# Altium PCB main.PcbDoc
Units mil, origin at the board's own origin, x right, y up, seen from the top; angles counter-clockwise.
Board outline 2610.56 x 2583.38 mil, 2 copper layers (Top Layer, Bottom Layer); 71 components, 38 nets, 228 pads, 56 vias.
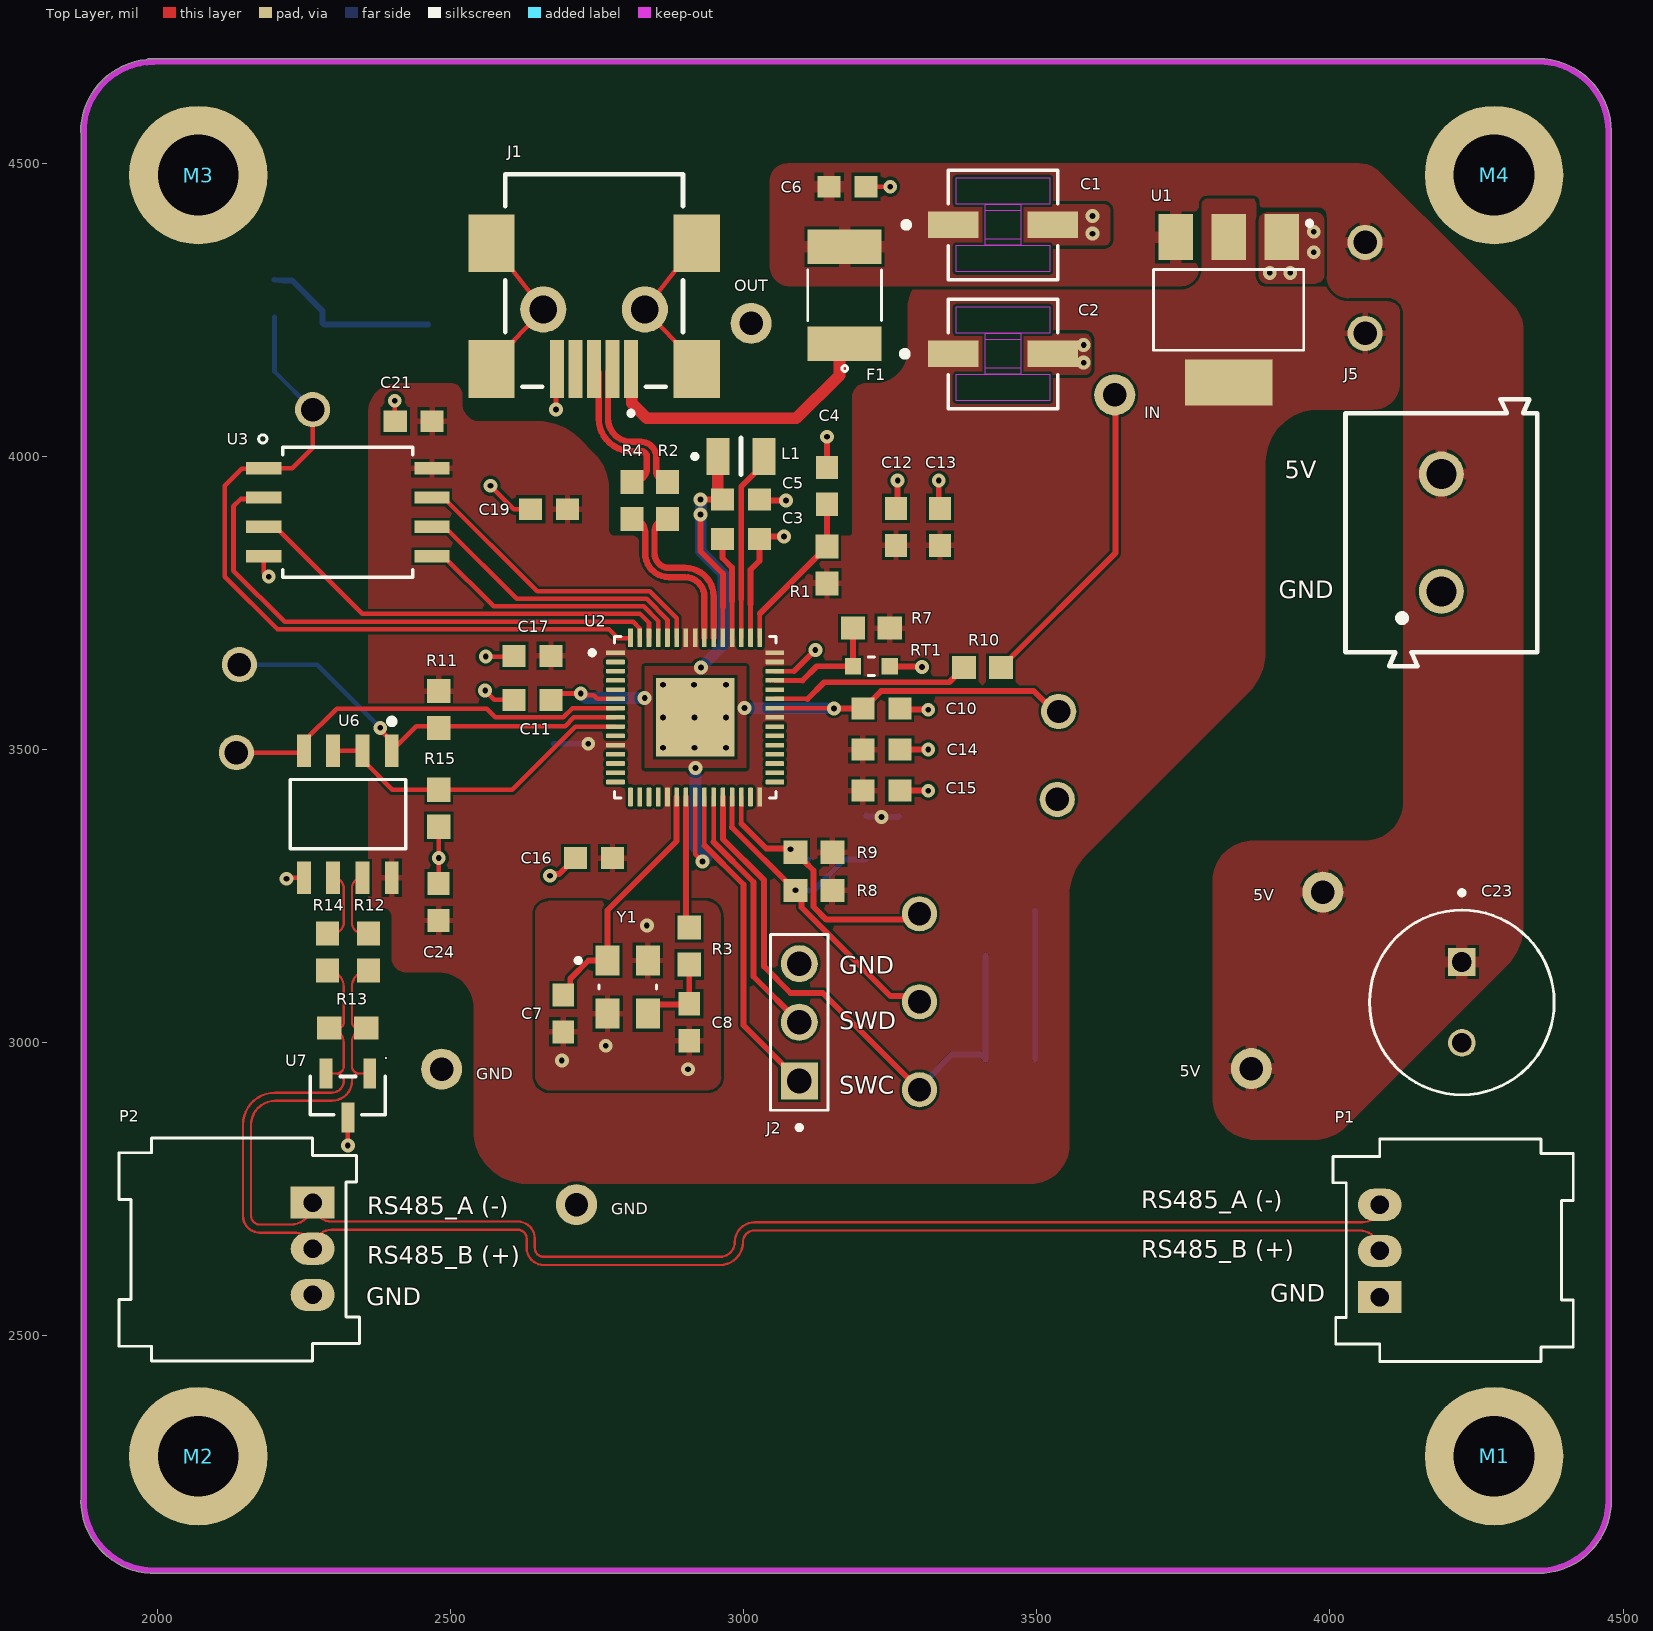
[diagram p0: Top Layer view]
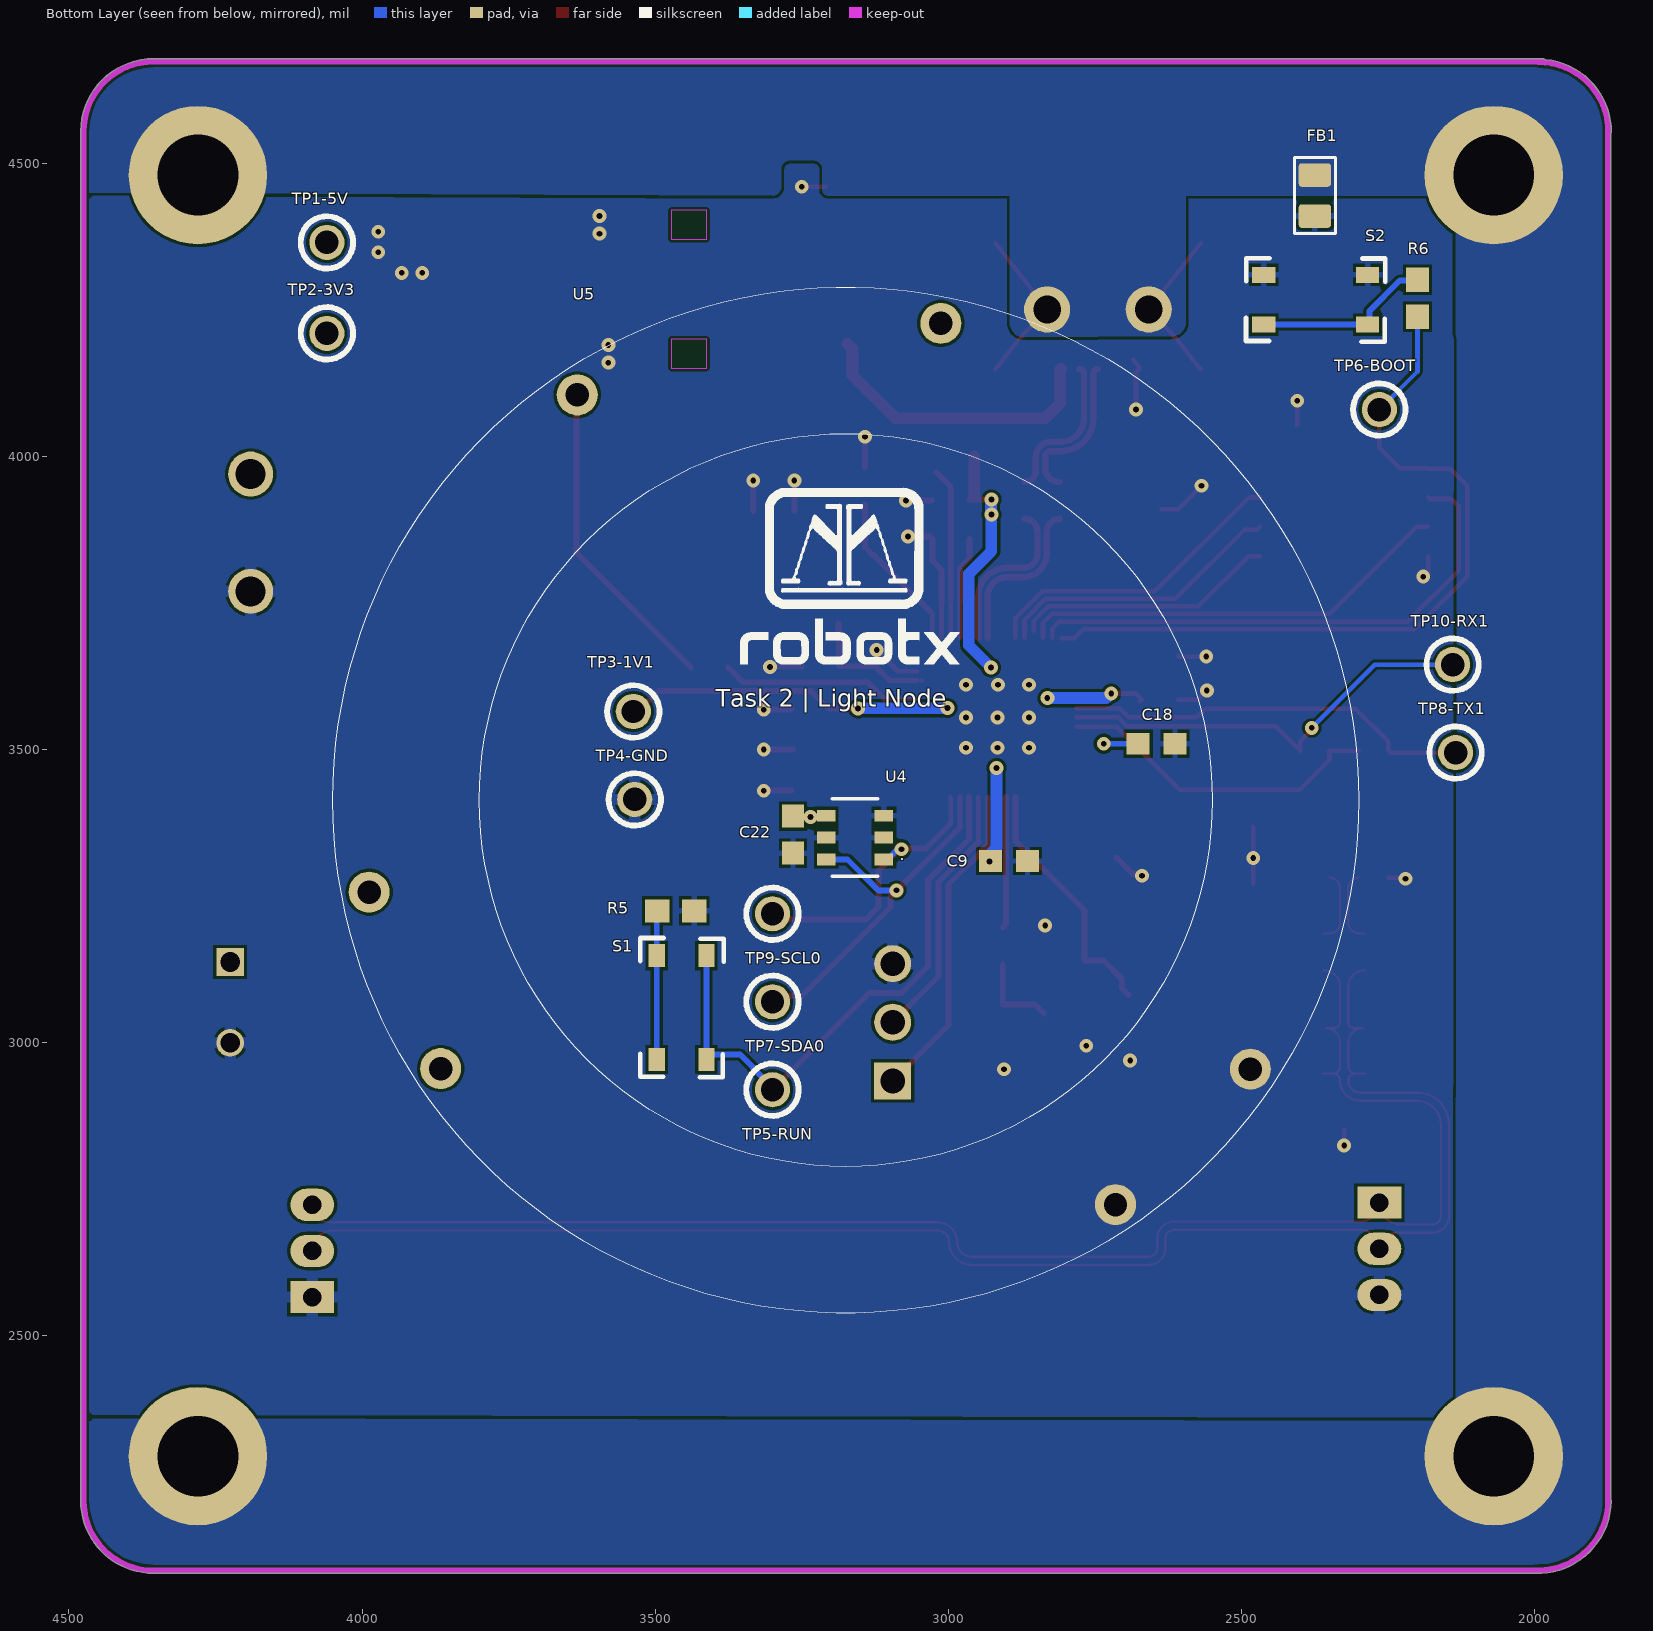
[diagram p1: Bottom Layer view, seen from below]
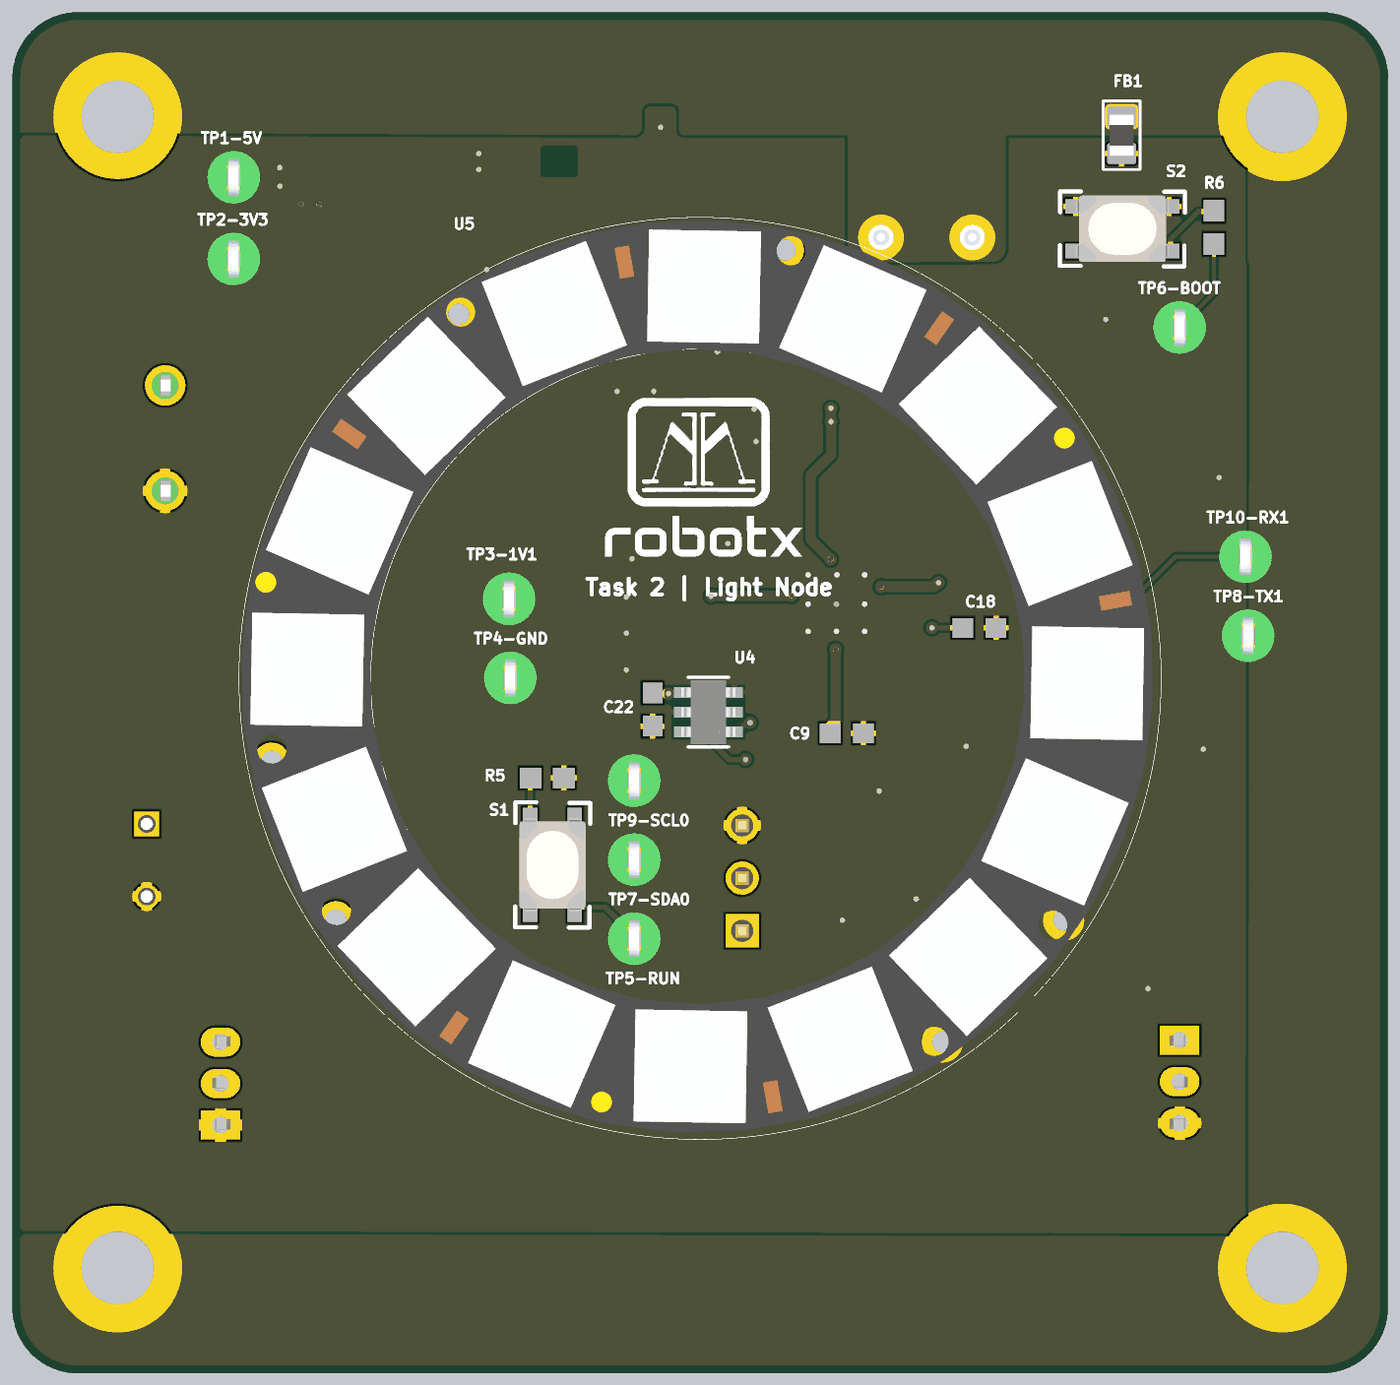
[diagram p2: 3D render of the assembled board from below, using the file's embedded part models]

## Layer stack, top to bottom
Top Solder: solder mask 0.4, Solder Resist, Dk 3.5
Top Layer: signal copper 1.4
Dielectric 1: dielectric 12.6, FR-4, Dk 4.8
Bottom Layer: signal copper 1.4
Bottom Solder: solder mask 0.4, Solder Resist, Dk 3.5

## Board outline
1870.06,2211.15 cw(c1994.2,2219.79) 1869.76,2219.79 1870.06,2221.49 1870.06,4550.7 1869.37,4553.22 cw(c1993.81,4553.22) 1905.82,4641.21 cw(c1993.81,4553.22) 1981.56,4677.05 1985,4678.45 4355.44,4678.45 cw(c4355.44,4554.01) 4443.43,4642 cw(c4355.44,4554.01) 4479.87,4554.82 4479.94,4554.01 4479.94,2219.5 cw(c4355.5,2219.5) 4443.49,2131.51 cw(c4355.5,2219.5) 4355.5,2095.06 1990,2095.06 1987.93,2095.52 cw(c1994.2,2219.79) 1906.21,2131.81 cw(c1994.2,2219.79)

## Design rules (kind name [scope] priority, off if disabled: settings)
Clearance [All] p1: gap=4.92 ignorepadtopadclearanceinfootprint=FALSE
DiffPairsRouting DiffPairsRouting_USB [InDifferentialPair('D')] p1: maxlimit=5 minlimit=5 mostfreqgap=5 toplayer_minwidth=10.91 toplayer_maxwidth=10.91 toplayer_prefwidth=10.91 bottomlayer_minwidth=10.91 bottomlayer_maxwidth=10.91 bottomlayer_prefwidth=10.91 impedanceprofiledriven=TRUE impedanceprofileid={66F68FF6-8895-42C2-95C7-FE0248E13F74} impedanceprofilevalue=90.000000 maxuncoupledlength=500
DiffPairsRouting DiffPairsRouting_USB_X [InDifferentialPair('DX')] p2: maxlimit=5 minlimit=5 mostfreqgap=5 toplayer_minwidth=10.91 toplayer_maxwidth=10.91 toplayer_prefwidth=10.91 bottomlayer_minwidth=10.91 bottomlayer_maxwidth=10.91 bottomlayer_prefwidth=10.91 impedanceprofiledriven=TRUE impedanceprofileid={66F68FF6-8895-42C2-95C7-FE0248E13F74} impedanceprofilevalue=90.000000 maxuncoupledlength=500
DiffPairsRouting DiffPairsRouting_RS485 [InDifferentialPair('RS485')] p3: maxlimit=12 minlimit=5 mostfreqgap=10 toplayer_minwidth=3.89 toplayer_maxwidth=8.08 toplayer_prefwidth=8.08 bottomlayer_minwidth=3.89 bottomlayer_maxwidth=8.08 bottomlayer_prefwidth=8.08 impedanceprofiledriven=TRUE impedanceprofileid={997596E2-6188-4B3D-A6B8-5A7A4A391E00} impedanceprofilevalue=120.000000 maxuncoupledlength=500
DiffPairsRouting DiffPairsRouting_RS485_X [InDifferentialPair('RS485X')] p4: maxlimit=12 minlimit=5 mostfreqgap=10 toplayer_minwidth=3.89 toplayer_maxwidth=8.08 toplayer_prefwidth=8.08 bottomlayer_minwidth=3.89 bottomlayer_maxwidth=8.08 bottomlayer_prefwidth=8.08 impedanceprofiledriven=TRUE impedanceprofileid={997596E2-6188-4B3D-A6B8-5A7A4A391E00} impedanceprofilevalue=120.000000 maxuncoupledlength=500
HoleSize [All] p1: absolutevalues=TRUE maxlimit=200 minlimit=1 maxpercent=80.000 minpercent=20.000
PolygonConnect Polygon_Cap_GND [IsNamedPolygon('T.5V-2') or IsNamedPolygon('T.3V3-2') or IsNamedPolygon('T.GND-2')] p1: thpad.connectstyle=Relief thpad.reliefconductorwidth=10 thpad.reliefentries=4 thpad.polygonreliefangle="90 Angle" thpad.airgapwidth=4.92 smdpad.connectstyle=Direct smdpad.reliefconductorwidth=10 smdpad.reliefentries=4 smdpad.polygonreliefangle="90 Angle" smdpad.airgapwidth=4.92 via.connectstyle=Direct via.reliefconductorwidth=10 via.reliefentries=4 via.polygonreliefangle="90 Angle" via.airgapwidth=4.92
PolygonConnect Polygon_GND_Connect [IsNamedPolygon('B.GND')] p2: thpad.connectstyle=Relief thpad.reliefconductorwidth=20 thpad.reliefentries=4 thpad.polygonreliefangle="90 Angle" thpad.airgapwidth=4.92 smdpad.connectstyle=Relief smdpad.reliefconductorwidth=10 smdpad.reliefentries=4 smdpad.polygonreliefangle="90 Angle" smdpad.airgapwidth=4.92 via.connectstyle=Direct via.reliefconductorwidth=10 via.reliefentries=4 via.polygonreliefangle="90 Angle" via.airgapwidth=4.92
PolygonConnect Polygon_3V3-2/GND-12/1V1-1_Connect_Relief90 [IsNamedPolygon('T.1V1-1') or IsNamedPolygon('T.GND-1') or IsNamedPolygon('B.GND-1') or IsNamedPolygon('T.3V3-2') vs (IsThruPin or IsSMTPin or IsPad or IsComponentPad or IsVia)] p3: thpad.connectstyle=Relief thpad.reliefconductorwidth=10 thpad.reliefentries=4 thpad.polygonreliefangle="90 Angle" thpad.airgapwidth=4.92 smdpad.connectstyle=Relief smdpad.reliefconductorwidth=10 smdpad.reliefentries=4 smdpad.polygonreliefangle="90 Angle" smdpad.airgapwidth=4.92 via.connectstyle=Direct via.reliefconductorwidth=10 via.reliefentries=4 via.polygonreliefangle="90 Angle" via.airgapwidth=4.92
PolygonConnect Polygon_5V [IsNamedPolygon('T.5V') vs (IsThruPin or IsSMTPin or IsPad or IsComponentPad or IsVia)] p4: thpad.connectstyle=Relief thpad.reliefconductorwidth=20 thpad.reliefentries=4 thpad.polygonreliefangle="90 Angle" thpad.airgapwidth=4.92 smdpad.connectstyle=Relief smdpad.reliefconductorwidth=20 smdpad.reliefentries=4 smdpad.polygonreliefangle="90 Angle" smdpad.airgapwidth=4.92 via.connectstyle=Direct via.reliefconductorwidth=10 via.reliefentries=4 via.polygonreliefangle="90 Angle" via.airgapwidth=4.92
PolygonConnect Polygon_3V3-3_Connect [IsNamedPolygon('T.3V3-3') vs (IsThruPin or IsSMTPin or IsPad or IsComponentPad or IsVia)] p5: thpad.connectstyle=Relief thpad.reliefconductorwidth=10 thpad.reliefentries=4 thpad.polygonreliefangle="90 Angle" thpad.airgapwidth=4.92 smdpad.connectstyle=Relief smdpad.reliefconductorwidth=10 smdpad.reliefentries=4 smdpad.polygonreliefangle="90 Angle" smdpad.airgapwidth=4.92 via.connectstyle=Direct via.reliefconductorwidth=10 via.reliefentries=4 via.polygonreliefangle="90 Angle" via.airgapwidth=4.92
PolygonConnect Polygon_3V3-1_Connect_Direct [IsNamedPolygon('T.3V3-1')] p6: connectstyle=Direct reliefconductorwidth=10 reliefentries=4 polygonreliefangle="90 Angle" airgapwidth=10
PolygonConnect Polygon_3V3-2_Connect [IsNamedPolygon('T.3V3-2')] p7: thpad.connectstyle=Relief thpad.reliefconductorwidth=10 thpad.reliefentries=4 thpad.polygonreliefangle="90 Angle" thpad.airgapwidth=10 smdpad.connectstyle=Relief smdpad.reliefconductorwidth=10 smdpad.reliefentries=4 smdpad.polygonreliefangle="90 Angle" smdpad.airgapwidth=10 via.connectstyle=Direct via.reliefconductorwidth=10 via.reliefentries=4 via.polygonreliefangle="90 Angle" via.airgapwidth=10
PolygonConnect PolygonConnect_1V1 [IsNamedPolygon('T.1V1-1')] p8: connectstyle=Direct reliefconductorwidth=10 reliefentries=4 polygonreliefangle="90 Angle" airgapwidth=10
PolygonConnect Polygon_EARTH_Direct_Connect [IsNamedPolygon('B.EARTH')] p9: connectstyle=Direct reliefconductorwidth=20 reliefentries=4 polygonreliefangle="90 Angle" airgapwidth=10
PolygonConnect [All] p10: connectstyle=Relief reliefconductorwidth=10 reliefentries=4 polygonreliefangle="90 Angle" airgapwidth=10
RoutingVias [All] p1: holewidth=28 width=50 viastyle="Through Hole" minholewidth=5.91 minwidth=15.75 maxholewidth=28 maxwidth=50
SolderMaskExpansion [All] p1: expansion=4 istentingtop=FALSE
SupplyNets "Schematic Supply Nets_5" [InNet('EARTH')] p1: voltage=0.000
SupplyNets "Schematic Supply Nets_3" [InNet('1V1')] p2: voltage=0.000
SupplyNets "Schematic Supply Nets_2" [InNet('3V3')] p3: voltage=0.000
SupplyNets "Schematic Supply Nets_1" [InNet('GND')] p4: voltage=0.000
SupplyNets "Schematic Supply Nets" [InNet('5V')] p5: voltage=0.000
Width [All] p1: maxlimit=27.56 minlimit=7.87 preferedwidth=10
28 further rules are at their usual default settings.

## Classes and differential pairs
component class rs485-interface: C24 P1 P2 R11 R12 R13 R14 R15 U6 U7
component class rp2350a: C1 C2 C3 C4 C5 C6 C7 C8 C9 C10 C11 C12 C13 C14 C15 C16 C17 C18 C19 C21 F1 FB1 J J1 J2 L1 M1 M2 M3 M4 R1 R2 R3 R4 R5 R6 S1 S2 TP1-5V TP2-3V3 TP3-1V1 TP4-GND TP5-RUN TP6-BOOT TP7-SDA0 TP8-TX1 TP9-SCL0 TP10-RX1 U1 U2 U3 Y1
component class node-circuits: C22 C23 J5 R7 R8 R9 R10 RT1 U4 U5
differential pair RS485X: +RS485X_P -RS485X_N
differential pair RS485: +RS485_P -RS485_N
differential pair DX: +DX_P -DX_N
differential pair D: +D_P -D_N

## Components (designator, comment, footprint, x,y, rotation, side; value= is the part's Value field where it differs from the comment)
C1 "10uF" RADIAL_CAN_CAP_4_X_5.8_SMD 3442.36,4395.03 r0 top
C2 "10uF" RADIAL_CAN_CAP_4_X_5.8_SMD 3442.36,4175.03 r0 top
C3 "Cap" CAPC0603 2995.52,3859.36 r0 top value=4.7uF
C4 "Cap" CAPC0603 3142.36,3950.03 r90 top value=4.7uF
C5 "Cap" CAPC0603 2995.52,3926.28 r0 top value=4.7uF
C6 "Cap" CAPC0603 3177.36,4460.03 r180 top value=100nF
C7 "Cap" CAPC0603 2692.36,3050.03 r270 top value=15pF
C8 "Cap" CAPC0603 2907.36,3035.03 r270 top value=15pF
C9 "Cap" CAPC0603 2896.5,3310 r180 bottom value=100nF
C10 "Cap" CAPC0603 3235,3570 r0 top value=4.7uF
C11 "Cap" CAPC0603 2640,3585 r180 top value=100nF
C12 "Cap" CAPC0603 3260,3880 r90 top value=100nF
C13 "Cap" CAPC0603 3335,3880 r90 top value=100nF
C14 "Cap" CAPC0603 3235,3500 r0 top value=100nF
C15 "Cap" CAPC0603 3235,3430 r0 top value=100nF
C16 "Cap" CAPC0603 2745,3315 r180 top value=100nF
C17 "Cap" CAPC0603 2640,3660 r180 top value=100nF
C18 "Cap" CAPC0603 2645,3510 r180 bottom value=100nF
C19 "Cap" CAPC0603 2668.19,3910 r180 top value=100nF
C21 "Cap" CAPC0603 2437.36,4060.03 r180 top value=100nF
C22 "Cap" CAPC0603 3265,3355 r270 bottom value=100nF
C23 "1000uF" CAPPRD350W60D800H1150 4225,3068.9 r270 top
C24 "Cap" CAPC0603 2480,3240 r270 top value=100nF
F1 "MF-MSMF050-2" FUSM4632X85 3172.36,4275.03 r90 top
FB1 "0805" L0805 2375,4445 r270 bottom
J1 "[USB]Mini-B-USB" SAMTEC_MUSB-05-X-B-SM-A-R-K-TR 2745,4300 r180 top
J2 "[Connector] 1x3-header-2.54mm pitch" 1x3-2.54MM-MALE-HEADER 3095,3035 r90 top
J5 "[Connector] 691213510002" "[CONNECTOR] 5MM_2PORT_SCREW" 4190,3870 r90 top
L1 "3.3uH" 2016_SMD_Inductor 2995.52,4000.1 r0 top
M1 "M3 Mount Hole" 3.5MM-MOUNTING-HOLE 4280,2295 r0 top
M2 "M3 Mount Hole" 3.5MM-MOUNTING-HOLE 2070,2295 r0 top
M3 "M3 Mount Hole" 3.5MM-MOUNTING-HOLE 2070,4480 r0 top
M4 "M3 Mount Hole" 3.5MM-MOUNTING-HOLE 4280,4480 r0 top
P1 "3pos RA sherlock connector" MOLEX-HDR-1X3-SHERLOCK-RA 4085,2566.26 r270 top
P2 "3pos RA sherlock connector" MOLEX-HDR-1X3-SHERLOCK-RA 2265,2727.48 r90 top
R1 "Res" RES0603 3142.36,3815.03 r90 top value=33
R2 "Res" RES0603 2870,3925 r270 top value=27
R3 "Res" RES0603 2907.36,3165.03 r90 top value=1k
R4 "Res" RES0603 2810,3925 r270 top value=27
R5 "Res" RES0603 3465,3225 r0 bottom value=1k
R6 "Res" RES0603 2200,4270 r270 bottom value=1k
R7 "Res" RES0603 3217.87,3707.22 r180 top value=10k
R8 "Res" RES0603 3120,3260 r180 top value=10k
R9 "Res" RES0603 3120,3325 r180 top value=10k
R10 "Res" RES0603 3407.36,3640.03 r0 top value=470
R11 "Res" RES0603 2480,3568.5 r90 top value=10k
R12 "Res" RES0603 2360,3155 r270 top value=10
R13 "Res" RES0603 2325,3025 r0 top value=120
R14 "Res" RES0603 2290,3155 r270 top value=10
R15 "Res" RES0603 2480,3400 r90 top value=10k
RT1 "ERT-J1VG103JA" THERM_ERT-J1VG103JA 3217.87,3642.22 r0 top
S1 "[SPST] SMD Pushbutton" "[SPST] SMD Pushbutton" 3455,3060 r90 bottom
S2 "[SPST] SMD Pushbutton" "[SPST] SMD Pushbutton" 2373.58,4267.32 r180 bottom
TP1-5V "TP" TPTH-100mil 4060,4365 r180 bottom
TP2-3V3 "TP" TPTH-100mil 4060,4210 r180 bottom
TP3-1V1 "TP" TPTH-100mil 3537.36,3565.03 r180 bottom
TP4-GND "TP" TPTH-100mil 3535,3415 r180 bottom
TP5-RUN "TP" TPTH-100mil 3300,2920 r180 bottom
TP6-BOOT "TP" TPTH-100mil 2265,4080 r180 bottom
TP7-SDA0 "TP" TPTH-100mil 3300,3070 r180 bottom
TP8-TX1 "TP" TPTH-100mil 2135,3495 r180 bottom
TP9-SCL0 "TP" TPTH-100mil 3300,3220 r180 bottom
TP10-RX1 "TP" TPTH-100mil 2140,3645 r0 bottom
U1 "NCP1117LPST33T3G" SOT230P700X175-4N 3827.36,4250.03 r270 top
U2 "[MCU] RP2350" QFN40P700X700X90-61N 2917.36,3555.03 r0 top
U3 "W25Q128JVSIQ TR" SOIC-8-W-208MIL-2 2325,3905 r0 top
U4 "Magnetometer" PG-TSOP6-6-5_INF 3159.25,3350 r0 bottom
U5 "16-LED-RING" WS2812-16-RING 3174,3412 r180 bottom
U6 "THVD1400DR" D0008B-MFG 2325,3390 r270 top
U7 "CDSOT23-SM712" SOT_SM712 2325,2910 r180 top
Y1 "ABM8-272-T3" XTAL_ABM8-272-T3 2802.36,3095.03 r0 top

## Footprints (in the part's own frame and the unit in brackets; to place one, negate y for a bottom-side part, rotate by r counter-clockwise, add the part's x,y. Pads: shape width x height; smd on the part's side, far side on the other; paste and mask are expansions set on the pad)
1x3-2.54MM-MALE-HEADER [mm]
  rect 1.605x1.605 hole 1.07: 1(-2.54,0)
  round 1.605 hole 1.07: 2(0,0) 3(2.54,0)
  silkscreen extent -4.66,-1.25 3.81,1.25, body extent -3.81,-1.25 3.81,1.25, height 8.95
3.5MM-MOUNTING-HOLE [mm]
  round 6 hole 3.5: 1(0,0)
2016_SMD_Inductor [mm] "0806 (2016 Metric)"
  rect 1x1.6 smd: 1(-1,0) 2(1,0)
  silkscreen extent -2.1,-0.8 0,0.8, body extent -1,-0.8 1,0.8, height 0.95
"[CONNECTOR] 5MM_2PORT_SCREW" [mm] "5.08 mm pitch 2 port screw terminal / 691213510002"
  round 1.95 hole 1.3: 1(-2.54,0) 2(2.54,0)
  silkscreen extent -5.78,-4.15 5.78,4.15, body extent -5.68,-4.04 5.68,4.06, height 10
"[SPST] SMD Pushbutton" [mm] "PTS815SJM250SMTRLFS"
  rect 1x0.7 smd: 1(-2.25,1.075) 1(2.25,1.075) 2(-2.25,-1.075) 2(2.25,-1.075)
  silkscreen extent -3.02,-1.82 3.02,1.8, body extent -2.25,-1.6 2.25,1.6, height 2.5
CAPC0603 [mm] "Chip Capacitor, 2-Leads, Body 1.60x0.80mm, IPC Medium Density"
  rect 1x0.95 smd: 1(-0.8,0) 2(0.8,0)
  body extent -0.88,-0.48 0.87,0.48, height 0.8
CAPPRD350W60D800H1150 [mm]
  round 1.2 hole 0.85: N(1.75,0)
  rect 1.2x1.2 hole 0.85: P(-1.75,0)
  silkscreen extent -4.85,-4 4,4, body extent -4,-4 4,4, height 11.5
D0008B-MFG [mm]
  rect 1.4x0.6 smd paste+0 mask+0: 1(-2.75,1.905) 2(-2.75,0.635) 3(-2.75,-0.635) 4(-2.75,-1.905) 5(2.75,-1.905) 6(2.75,-0.635) 7(2.75,0.635) 8(2.75,1.905)
  silkscreen extent -4.14,-2.5 1.5,2.5, body extent -2.96,-2.42 3.06,2.48, height 1.63
FUSM4632X85 [mm]
  rect 1.5x3.2 smd: 1(-2.1,0) 2(2.1,0)
  silkscreen extent -3.3,-1.6 1.1,1.6, body extent -2.27,-1.62 2.27,1.62, height 1.1
L0805 [mil]
  rrect25% 40x55 smd: 1(-35,0) 2(35,0)
  silkscreen extent -65,-35 65,35, body extent -39,-24 39,24, height 43
MOLEX-HDR-1X3-SHERLOCK-RA [mm]
  rect 1.397x1.905 hole 0.8: 1(0,0)
  oval 1.397x1.905 hole 0.8: 2(-2,0) 3(-4,0)
  silkscreen extent -6.86,-2.03 2.79,8.38, body extent -6.88,-1.99 2.82,8.51, height 5.75
PG-TSOP6-6-5_INF [mil]
  rect 31.5x20 smd paste+0 mask+0: 1(-49.25,37.4) 2(-49.25,0) 3(-49.25,-37.4) 4(49.25,-37.4) 5(49.25,0) 6(49.25,37.4)
  silkscreen extent -38,-66 38,66, body extent -51,-61 51,61, height 43
QFN40P700X700X90-61N [mm] "RP2350"
  rrect25% 0.81x0.2 smd paste+0 mask+0.102: 1(-3.45,2.8) 2(-3.45,2.4) 3(-3.45,2) 4(-3.45,1.6) 5(-3.45,1.2) 6(-3.45,0.8) 7(-3.45,0.4) 8(-3.45,0) 9(-3.45,-0.4) 10(-3.45,-0.8) 11(-3.45,-1.2) 12(-3.45,-1.6) 13(-3.45,-2) 14(-3.45,-2.4) 15(-3.45,-2.8) 31(3.45,-2.8) 32(3.45,-2.4) 33(3.45,-2) 34(3.45,-1.6) 35(3.45,-1.2) 36(3.45,-0.8) 37(3.45,-0.4) 38(3.45,0) 39(3.45,0.4) 40(3.45,0.8) 41(3.45,1.2) 42(3.45,1.6) 43(3.45,2) 44(3.45,2.4) 45(3.45,2.8)
  rrect25% 0.2x0.81 smd paste+0 mask+0.102: 16(-2.8,-3.45) 17(-2.4,-3.45) 18(-2,-3.45) 19(-1.6,-3.45) 20(-1.2,-3.45) 21(-0.8,-3.45) 22(-0.4,-3.45) 23(0,-3.45) 24(0.4,-3.45) 25(0.8,-3.45) 26(1.2,-3.45) 27(1.6,-3.45) 28(2,-3.45) 29(2.4,-3.45) 30(2.8,-3.45) 46(2.8,3.45) 47(2.4,3.45) 48(2,3.45) 49(1.6,3.45) 50(1.2,3.45) 51(0.8,3.45) 52(0.4,3.45) 53(0,3.45) 54(-0.4,3.45) 55(-0.8,3.45) 56(-1.2,3.45) 57(-1.6,3.45) 58(-2,3.45) 59(-2.4,3.45) 60(-2.8,3.45)
  rect 3.4x3.4 smd paste-0.62 mask+0.102: 61(0,0)
  silkscreen extent -4.56,-3.5 3.5,3.5, body extent -3.55,-3.55 3.55,3.55, height 0.96
RADIAL_CAN_CAP_4_X_5.8_SMD [mil]
  rect 86x45 smd paste+0 mask+0: 1(-85,0) 2(85,0)
  Top Layer keep-out region: -30,-35 -30,35 30,35 30,-35
  Top Layer keep-out region: -80,-80 -80,-35 80,-35 80,-80
  Top Layer keep-out region: -80,35 -80,80 80,80 80,35
  Keep-Out Layer region: -30,-24.5 -30,24.5 30,24.5 30,-24.5
  silkscreen extent -94,-94 94,94, body extent -108,-89 108,89, height 242
RES0603 [mm] "Chip Resistor, 2-Leads, Body 1.60x0.80mm, IPC Medium Density"
  rect 1.05x1 smd: 1(-0.8,0) 2(0.8,0)
  body extent -0.88,-0.48 0.87,0.47, height 0.8
SAMTEC_MUSB-05-X-B-SM-A-R-K-TR [mm]
  rect 0.6x2.5 smd: 1(-1.6,3.83) 2(-0.8,3.83) 3(0,3.83) 4(0.8,3.83) 5(1.6,3.83)
  rect 2x2.5 smd: SH(-4.45,3.83) SH(-4.45,-1.62) SH(4.45,3.83) SH(4.45,-1.62)
  round 2 hole 1.2: SH(-2.2,1.25) SH(2.2,1.25)
  silkscreen extent -3.85,-4.6 3.85,5.85, body extent -5,-4.6 5,4.9, height 4.13
SOIC-8-W-208MIL-2 [mil] "208mil x 150mil SOIC-8 package"
  rect 60x21 smd paste+0 mask+0: 1(-143.5,75) 2(-143.5,25) 3(-143.5,-25) 4(-143.5,-75) 5(143.5,-75) 6(143.5,-25) 7(143.5,25) 8(143.5,75)
  silkscreen extent -152,-111 111,132, body extent -159,-106 159,106, height 85
SOT230P700X175-4N [mm]
  rect 2x1.5 smd: 1(-3.15,2.3) 2(-3.15,0) 3(-3.15,-2.3)
  rect 2x3.8 smd: 4(3.15,0)
  silkscreen extent -3.85,-3.25 1.75,3.6, body extent -3.5,-3.25 3.5,3.25, height 1.8
SOT_SM712 [mil]
  rect 22x51 smd paste+0 mask+0: 1(-37.4,-37.5) 2(37.4,-37.5) 3(0,37.5)
  silkscreen extent -64,-33 64,33, body extent -59,-49 59,49, height 46
THERM_ERT-J1VG103JA [mm]
  rect 0.7x0.7 smd: 1(-0.8,0) 2(0.8,0)
  silkscreen extent -0.14,-0.4 0.14,0.4, body extent -0.8,-0.4 0.8,0.4, height 0.9
TPTH-100mil [mil] "Test Point"
  round 60 hole 40: 1(0,0)
  silkscreen extent -45,-45 45,45, body extent -50,-50 50,50, height 182
WS2812-16-RING [mil]
  round 70 hole 40: 1(-814,-155) 1(-692,-456) 2(459,-688) 2(689,-457) 3(-459,693) 4(161,815)
  Top Layer lines w10: -459,692 -459,693
  silkscreen extent -876,-873 874,877, body extent -1204,-1192 1191,1204, height 115
XTAL_ABM8-272-T3 [mm]
  rect 1.05x1.3 smd: 1(-0.875,1.15) 2(-0.875,-1.15) 3(0.875,-1.15) 4(0.875,1.15)
  silkscreen extent -2.24,-0.09 1.25,1.25, body extent -1.25,-1.6 1.25,1.6, height 0.7

## Part data
C1 C2: library part EEE-FK1E100R, "10uF electrolytic cap, radial can, SMD", Manufacturer_Name=Panasonic, Copyright="Copyright (C) 2025 Ultra Librarian. All rights reserved.", Manufacturer_Part_Number=EEE-FK1E100R
C3 C4 C5 C6 C7 C8 C9 C10 C11 C12 C13 C14 C15 C16 C17 C18 C19 C21 C22 C24: Supplier Part Number 1=1276-1000-1-ND, Supplier 1=Digi-Key
C23: library part EEUFM1H101, "EEUFM1H101. Cap Aluminum Lytic 100uF 50V 20% (8 X 11.5mm) Radial 3.5mm 870mA 3000h 105?ÂÂŽ Bulk", Package="RADIAL-2 Panasonic", Availability="In Stock", Check_prices=https://www.snapeda.com/parts/EEUFM1H101/Panasonic/view-part/1510333/?ref=eda, MF=Panasonic, MP=EEUFM1H101, Price=None, SnapEDA_Link=https://www.snapeda.com/parts/EEUFM1H101/Panasonic/view-part/1510333/?ref=snap
F1: "[Fuse] Polymeric PTC Resettable Fuse 15V 500 mA Ih Surface Mount 1812 (4532 Metric), Concave", Package="1812 Bourns", Availability="In Stock", Check_prices=https://www.snapeda.com/parts/MF-MSMF050-2/Bourns+-+J.W.+Miller/view-part/?ref=eda, MF=Bourns, MP=MF-MSMF050-2, Price=None, Purchase-URL=https://pricing.snapeda.com/search/part/MF-MSMF050-2/?ref=eda, SnapEDA_Link=https://www.snapeda.com/parts/MF-MSMF050-2/Bourns+-+J.W.+Miller/view-part/?ref=snap
FB1: library part MH2029-300Y, "[Inductor] Ferrite Bead Bourns MH2029-300Y / SMD-FERRITE-BEAD-30R-3A(0805)", Package="0805 Bourns", Check_prices=https://www.snapeda.com/parts/MH2029-300Y/Bourns/view-part/?ref=eda, MF=Bourns, MP=MH2029-300Y, SnapEDA_Link=https://www.snapeda.com/parts/MH2029-300Y/Bourns/view-part/?ref=snap
J1: "USB - mini B USB 2.0 Receptacle Connector 5 Position Surface Mount, Right Angle / MUSB-05-X-B-SM-A-R-K-TR", Package=None, Check_prices=https://www.snapeda.com/parts/MUSB-05-F-B-SM-A-R-K-TR/Samtec/view-part/?ref=eda, MF=Samtec, MP=MUSB-05-F-B-SM-A-R-K-TR, SnapEDA_Link=https://www.snapeda.com/parts/MUSB-05-F-B-SM-A-R-K-TR/Samtec/view-part/?ref=snap
J2: "1x3 2.54mm header", Package=None, Availability="In Stock", Check_prices=https://www.snapeda.com/parts/G800W305018EU/NEC/view-part/?ref=eda, MF="FCI Connectors", MP=G800W305018EU, Price=None, SnapEDA_Link=https://www.snapeda.com/parts/G800W305018EU/NEC/view-part/?ref=snap
J5: "2 Position Wire to Board Terminal Block Horizontal with Board 0.200 (5.08mm) Through Hole", Package=None, Check_prices=https://www.snapeda.com/parts/691213510002/W%25C3%25BCrth+Elektronik+Midcom/view-part/?ref=eda, MF="WÃ¼rth Elektronik", MP=691213510002, SnapEDA_Link=https://www.snapeda.com/parts/691213510002/W%25C3%25BCrth+Elektronik+Midcom/view-part/?ref=snap
L1: library part "INDUCTOR 3.3uH", "Power Inductors - SMD IND 3.3uH used for RP2350 VREG", Manufacturer_Name=ABRACON, Manufacturer_Part_Number=AOTA-B201610S3R3-101-T, Mouser Part Number=815-AB201610S3R3101T, Datasheet Link=https://abracon.com/datasheets/AOTA-B201610S3R3-101-T.pdf, Geometry.Height=1mm, Mouser Price/Stock=https://www.mouser.co.uk/ProductDetail/ABRACON/AOTA-B201610S3R3-101-T?qs=%252BXxaIXUDbq0IZvJW%2F2mv4w%3D%3D
M1 M2 M3 M4: library part "[Mount] M3 Mount Hole", "Place at least 4.5mm from board edge. Plated."
P1 P2: library part MOLEX-HDR-1x3-SHERLOCK_RA, "Header, Molex, 2mm Pitch Sherlock Header, Single Row, Right Angle 3 Circuits, Length 3.3mm", Manufacturer="Molex Connector Corporation", Manufacturer Part Number=35363-0360, Supplier Part Number 1=WM18932-ND, Supplier 1=Digi-Key
R1 R2 R3 R4 R5 R6 R7 R8 R9 R10 R11 R12 R13 R14 R15: "SMD, RES0603", Supplier Part Number 1=RMCF0603JT10K0CT-ND, Supplier 1=Digi-Key
RT1: "Series/Type: NTC Thermistor(Chip type), Style: 0603, B Value (K): 3301 to 3400, Resistance Tolerance (%): Â±5, Resistance R25 (â„", Package="0603-2 Panasonic", Check_prices=https://www.snapeda.com/parts/ERT-J1VG103JA/Panasonic+Electronic+Components/view-part/?ref=eda, MF="Panasonic Electronic", MP=ERT-J1VG103JA, SnapEDA_Link=https://www.snapeda.com/parts/ERT-J1VG103JA/Panasonic+Electronic+Components/view-part/?ref=snap
S1 S2: "PTS815SJM250SMTRLFS", Supplier Part Number 1=CKN12215-6-ND, Supplier 1=DigiKey
TP1-5V TP2-3V3 TP3-1V1 TP4-GND TP5-RUN TP6-BOOT TP7-SDA0 TP8-TX1 TP9-SCL0 TP10-RX1: "Test Point"
U1: "Linear Voltage Regulator IC Positive Fixed 1 Output 1A SOT-223", Package="SOT-223-4 ON Semiconductor", Check_prices=https://www.snapeda.com/parts/NCP1117LPST33T3G/Onsemi/view-part/?ref=eda, MF="ON Semiconductor", MP=NCP1117LPST33T3G, SnapEDA_Link=https://www.snapeda.com/parts/NCP1117LPST33T3G/Onsemi/view-part/?ref=snap
U2: library part SC1509(13), "RP2350A MCU from Raspberry Pi Pico; QFN 60 7x7,", Package=None, Check_prices=https://www.snapeda.com/parts/SC1509-A4/Raspberry+Pi/view-part/?ref=eda, MF="Raspberry Pi", MP=SC1509-A4, SnapEDA_Link=https://www.snapeda.com/parts/SC1509-A4/Raspberry+Pi/view-part/?ref=snap
U3: "IC FLASH 128MBIT SPI/QUAD 8SOIC", Manufacturer_Name=Winbond, Copyright="Copyright (C) 2025 Ultra Librarian. All rights reserved.", Manufacturer_Part_Number="W25Q128JVSIQ TR", RefDes=RefDes, Type=Type
U4: library part TLV493DA1B6HTSA2, "The Infineon TLV493D-A1B6 magnetic sensor offers accurate three dimensional sensing with extremely low power consumption in a small 6-pin package. With an opportunity to detect the magnetic field in x, y, and z-direction the sensor is ideally suited for the measurement of 3D movements, linear movements and rotation movements. It is usable in any kind of industrial and consumer applications that require a low power consumption.", Manufacturer_Name=Infineon, Copyright="Copyright (C) 2025 Ultra Librarian. All rights reserved.", Manufacturer_Part_Number=TLV493DA1B6HTSA2, RefDes=RefDes, Type=Type
U5: library part WS2812B-16-LED-RING, "16-LED Ring, RGB WS2812 neopixels"
U6: "3.3-V to 5-V, 500-Kbps, RS-485 transceiver in small package option with &plusmn;12-kV IEC ESD pro 8-SOIC -40 to 125", Manufacturer_Name="Texas Instruments", Copyright="Copyright (C) 2026 Ultra Librarian. All rights reserved.", Manufacturer_Part_Number=THVD1400DR, RefDes=RefDes, Type=TYPE
U7: "TVS DIODE 12VWM 7VWM SOT23-3", Manufacturer_Name="Bourns Electronics", Copyright="Copyright (C) 2026 Ultra Librarian. All rights reserved.", Manufacturer_Part_Number=CDSOT23-SM712, RefDes=RefDes, Type=Type
Y1: "12 MHz Â±30ppm Crystal 10pF 50 Ohms 4-SMD, No Lead", Package="NON-STANDARD-4 Abracon", Check_prices=https://www.snapeda.com/parts/ABM8-272-T3/Abracon/view-part/?ref=eda, MF=ABRACON, MP=ABM8-272-T3, SnapEDA_Link=https://www.snapeda.com/parts/ABM8-272-T3/Abracon/view-part/?ref=snap

## Via types
v1: diameter 23.62, hole 9.84, Top Layer to Bottom Layer, tented both sides, 56 vias

## Nets (pads, with @x,y where several pads share a name; then routed paths per layer and width w, separated by ;. In a path a pad name is that pad's centre, name@x,y a point inside that pad or via, vN(x,y) a via of type N, cw(c..) or ccw(c..) an arc to the next point about the centre after c; other vN are vias at no path point)
1V1: C5.1 C9.1 C10.1 C11.1 L1.1 TP3-1V1.1 U2.6 U2.23 U2.39 U2.50 | length 1823.7
  Top Layer w8: C11.1@2671.5,3586.53 2680.59,3595.63 v1(2722.36,3595.63) 2725.35,3592.64 2744.07,3592.64 2750.17,3586.53 U2.6 ; U2.23 2917.36,3321.87 v1(2930,3309.23) ; U2.50 2964.61,3742.79 ; U2.39 v1@3150.71,3570.78
  Top Layer w10: C11.1 C11.1@2672.45,3584.05 ; v1(2926.61,3901.14) 2926.61,3838.39 2964.61,3800.39 2964.61,3742.79 ; v1(2926.61,3926.73) 2964.02,3926.73 C5.1 ; v1@3150.71,3570.78 v1@3151.43,3570.06 ; v1(3154.07,3570.02) C10.1 3204.49,3570 3234.57,3600.08 3494.64,3600.08 3529.68,3565.03 TP3-1V1.1
  Top Layer w20: C5.1@2956.15,3934.15 L1.1
  Bottom Layer w10: v1(3001.5,3571.18) v1@3002.05,3570.63
  Bottom Layer w19.68: v1(2926.61,3901.14) 2926.61,3838.39 2965,3800 2965,3677.67 v1(2927.36,3640.03) ; v1@2927.36,3901.14 v1@2927.36,3925.98
  Bottom Layer w20: v1(2722.36,3595.63) 2723.34,3595.63 2731.06,3587.91 v1(2831.22,3587.91) ; v1(2917.83,3468.81) 2917.83,3333.66 2921.81,3329.69 2921.81,3328.7 2935.51,3315 2936.5,3315 2932.99,3311.5 2932.27,3311.5 v1(2930,3309.23) ; v1@3002.05,3570.63 3150.86,3570.63 v1@3151.43,3570.06
3V3: C2.1 C3.1 C12.1 C13.1 C14.1 C15.1 C16.1 C17.1 C18.1 C19.1 C21.1 C22.1 C24.2 R1.1 R7.1 R8.1 R9.1 R11.2 TP2-3V3.1 U1.2 U1.4 U2.1 U2.11 U2.20 U2.30 U2.38 U2.44 U2.45 U2.49 U2.53 U2.54 U3.8 U4.4 U6.8 | length 291.9
  Top Layer w8: U2.49 2980.35,3753.03
  Top Layer w10: C3.1 2964.02,3826.69 2980.35,3810.36 2980.35,3753.03
  Bottom Layer w10: C18.1 v1(2735,3510) ; U4.4 3209.7,3386.2 3233.8,3386.2 v1(3235,3385) 3263.5,3385 C22.1
5V: C1.1 C6.2 C23.P F1.2 J5.2 TP1-5V.1 U1.3 U5.1
ADC_TEMP: R7.2 RT1.1 U2.42 | length 216.5
  Top Layer w8: U2.42@3045.23,3618.09 U2.42@3045.29,3618.03 ; U2.42 3100.35,3618.03
  Top Layer w10: 3100.35,3618.03 3124.55,3642.22 RT1.1 3186.38,3696.24 3187.36,3697.22 R7.2@3187.36,3715.03
D/R\: R15.2 U2.9 U6.2 U6.3 | length 563.1
  Top Layer w7.87: U6.3 U6.2 2350,3482.52 2401.02,3431.5 2605.1,3431.5 2712.89,3539.29 U2.9
D_N: J1.2 R2.1 | length 262
  Top Layer w10.91: J1.2 ccw(c2776.5,4141.42) 2768.7,4141.42 2768.7,4065 ccw(c2808.7,4065) 2808.7,4025 2825,4025 cw(c2825,3999.09) 2850.91,3999.09 2850.91,3975.58 ccw(c2870,3975.58) R2.1
D_P: J1.3 R4.1 | length 266
  Top Layer w10.91: J1.3 cw(c2745,4141.42) 2752.79,4141.42 2752.79,4065 ccw(c2808.7,4065) 2808.7,4009.09 2825,4009.09 cw(c2825,3999.09) 2835,3999.09 2835,3980 cw(c2811.5,3980) 2811.5,3956.5 R4.1
DX_N: R2.2 U2.51 | length 284.4
  Top Layer w10.91: R2.2 ccw(c2870,3871.46) 2847.96,3871.46 2847.96,3835 ccw(c2872.96,3835) 2872.96,3810 2900,3810 cw(c2900,3760.98) 2949.02,3760.98 U2.51@2949.02,3691.03
DX_P: R4.2 U2.52 | length 284.5
  Top Layer w10.91: R4.2 cw(c2810,3871.46) 2832.04,3871.46 2832.04,3835 ccw(c2872.96,3835) 2872.96,3794.09 2900,3794.09 cw(c2900,3760.98) 2933.11,3760.98 U2.52
EARTH: FB1.1 J1.SH M1.1 M2.1 M3.1 M4.1 | length 556.8
  Top Layer w7.87: J1.SH@2569.8,4149.21 2573.71,4153.35 2609.14,4198.62 J1.SH@2658.39,4250.79 ; J1.SH@2569.8,4363.78 J1.SH@2658.4,4250.9 ; J1.SH@2831.61,4250.79 2880.86,4198.62 2916.29,4153.35 J1.SH@2920.2,4149.21 ; J1.SH@2831.6,4250.9 J1.SH@2920.2,4363.78
GND: C1.2 C2.2 C3.2 C4.2 C5.2 C6.1 C7.2 C8.2 C9.2 C10.2 C11.2 C12.2 C13.2 C14.2 C15.2 C16.2 C17.2 C18.2 C19.2 C21.2 C22.2 C23.N C24.1 FB1.2 J1.5 J2.3 J5.1 P1.1 P2.3 R5.1 R15.1 RT1.2 S2.1 TP4-GND.1 U1.1 U2.43 U2.47 U2.61 U3.4 U4.2 U4.3 U4.5 U5.2 U6.5 U7.3 Y1.2 Y1.4 | length 1376.5
  Top Layer w7.87: v1(2680,4080) 2680,4143.37 2674.72,4148.65 2674.41,4152.65 2675.93,4154.42 J1.5@2685,4165
  Top Layer w8: U3.4 2181.5,3803.5 ccw(c2190,3803.5) v1(2190,3795) ; v1(2220.22,3279.89) cw(c2222.06,3279.89) 2222.06,3281.73 U6.5 ; U7.3@2324.71,2852.21 2325,2851.92 v1(2325,2825) ; C21.2@2405,4053.5 v1(2405,4095) ; C24.1 v1(2480,3315) R15.1 ; v1(2559.21,3600.83) 2575.04,3585 C11.2 ; v1(2560.14,3658.65) 2607.15,3658.65 C17.2 ; v1(2568.19,3950) 2608.19,3910 C19.2 ; U2.47 3011.85,3806.85 ; U2.43 3086.1,3633.78 ; C6.1 v1(3250,4460)
  Top Layer w10: v1(2670,3285) 2672.61,3287.61 2685.13,3287.61 2712.52,3315 C16.2 ; 3011.47,3747.26 3011.47,3804.59 ; 3011.85,3806.85 3027.01,3822.01 C3.2 3031.31,3863.65 v1(3068.75,3863.65) ; C5.2@3028.26,3925.03 v1(3072.36,3925.03) ; 3086.1,3633.78 v1(3122.36,3670.03) ; C4.2 v1(3142.35,4033.73) ; RT1.2 3250.02,3641.57 3303.55,3641.57 v1(3304.19,3640.92) ; C12.2@3262.77,3906.62 v1(3262.77,3958.81) ; C14.2@3265,3500 C14.2 v1(3315,3500) ; C15.2@3267.36,3430 v1(3315,3430) ; C10.2@3267.4,3570 3269.25,3568.15 v1(3315,3568.15) ; C13.2@3332.77,3906.62 v1(3332.77,3958.81)
  other v1: 2905,2955 2690,2970 2765,2995 2835,3200 2862.72,3503.26 2916.31,3503.26 2970,3503.26 2862.72,3555 2916.31,3555 2970,3555 2862.72,3610.55 2915.32,3610.55 2970,3610.55 3580,4160 3580,4190 3897.37,4313.19 3932.37,4313.19 3972.37,4348.19 3595,4380 3972.37,4383.19 3595,4410
I2C0_SCL: R9.2 TP9-SCL0.1 U2.28 U4.1 | length 496.3
  Top Layer w8: 2996.1,3373.9 U2.28
  Top Layer w10: 2996.1,3373.9 3038.54,3331.46 R9.2@3076.77,3331.46 ; R9.2@3074.8,3331.97 3076.77,3330 v1(3080,3330) ; R9.2@3082.05,3331.46 R9.2 3089.49,3325 3104.17,3310.31 3104.17,3308.79 3119.09,3293.87 3119.09,3232.01 3141.1,3210 3269.14,3210 3269.58,3210.43 3290.43,3210.43 TP9-SCL0.1
  Bottom Layer w10: v1(3080,3330) 3082.61,3327.39 3089.45,3327.39 3104.25,3312.6 U4.1
I2C0_SDA: R8.2 TP7-SDA0.1 U2.27 U4.6 | length 648.4
  Top Layer w8: 2980.35,3368.15 U2.27
  Top Layer w10: 2980.35,3368.15 2980.35,3367.17 3087.52,3260 R8.2@3089.49,3260 ; v1(3088.5,3260) 3098.83,3249.68 3098.83,3231.17 3250.43,3079.57 3290.43,3079.57 TP7-SDA0.1
  Bottom Layer w10: v1(3088.5,3260) 3119.42,3260 3172.02,3312.6 U4.6
NEOPIX_D: R10.1 U2.40 | length 345.4
  Top Layer w8: U2.40 3108.86,3586.53
  Top Layer w10: 3108.86,3586.53 3137.33,3615 3350.83,3615 3360.2,3624.37 3360.2,3625.35 3374.88,3640.03 R10.1
NetC8_1: C8.1 R3.1 Y1.3 | length 144.2
  Top Layer w10: Y1.3 2836.81,3049.88 2852.48,3065.55 C8.1@2907.36,3065.55 ; C8.1 R3.1
NetF1_1: F1.1 J1.1 | length 511.9
  Top Layer w20: J1.1 2809.14,4148.06 2809.14,4090.86 2835,4065 3090,4065 3163.69,4138.69 3163.69,4183.68 F1.1
NetR5_2: R5.2 S1.1 | length 253.9
  Bottom Layer w10: R5.2 3497.32,3224.17 3497.32,3148.58 S1.1@3497.32,2971.42
NetR6_1: R6.1 S2.2 | length 305
  Bottom Layer w10: R6.1 2214.69,4300 2230,4300 2282.08,4247.92 2282.08,4227.92 2285,4225 S2.2@2462.17,4225
NetR10_2: R10.2 U5.3 | length 533.8
  Top Layer w10: R10.2 3634,3835.18 U5.3@3634,4093
QSPI_SCLK: U2.56 U3.6 | length 498.1
  Top Layer w7.87: U3.6 2473.54,3874.96 2495.04,3874.96 2612.8,3757.2 2834.7,3757.2 2870.12,3721.79 U2.56
QSPI_SD0: U2.57 U3.5 | length 448.3
  Top Layer w7.87: U3.5 2488,3830 2573.59,3744.41 2829.4,3744.41 2854.37,3719.44 U2.57@2854.37,3702.81
QSPI_SD1: U2.59 U3.2 | length 917.4
  Top Layer w7.87: U3.2 2178.89,3927.39 2142.39,3927.39 2129.92,3914.92 2129.92,3805.08 2217.2,3717.8 2812.03,3717.8 2822.34,3707.48 2822.87,3706.95 U2.59
QSPI_SD2: U2.58 U3.3 | length 750.4
  Top Layer w7.87: U3.3 2201,3880 2349.39,3731.61 2823.39,3731.61 2838.62,3716.38 U2.58
QSPI_SD3: U2.55 U3.7 | length 535.9
  Top Layer w7.87: U3.7 2488,3930 2648,3770 2840,3770 2885.87,3724.13 U2.55
QSPI_SS: R6.2 TP6-BOOT.1 U2.60 U3.1 | length 1318
  Top Layer w7.87: TP6-BOOT.1 2265,4015 2230,3980 U3.1 2180.8,3979.3 2144.3,3979.3 2115,3950 2115,3795 2205,3705 2770.39,3705 2785.39,3690 U2.60@2807.13,3690
  Bottom Layer w7.87: R6.2 2200,4145 TP6-BOOT.1
RS485_N: P1.3 P2.1 R12.2 R13.2 U7.1 | length 2706.2
  Top Layer w3.89: R12.2 ccw(c2360,3095.45) 2331.95,3095.45 2331.95,3035 ccw(c2341.95,3035) 2341.95,3025 R13.2 ccw(c2356.5,3000.45) 2331.95,3000.45 2331.95,2960 ccw(c2344.45,2960) 2344.45,2947.5 ; U7.1 2344.45,2947.5 ; P1.3 cw(c4055.15,2723.74) 4055.15,2693.89 3018.89,2693.89 ccw(c3018.89,2660) 2985,2660 cw(c2960,2660) 2960,2635 2658.89,2635 cw(c2658.89,2650) 2643.89,2650 2643.89,2666.16 ccw(c2615,2666.16) 2615,2695.06 2297.42,2695.06 cw(c2297.42,2727.48) P2.1 cw(c2227.52,2727.48) 2227.52,2690 2175,2690 cw(c2175,2705) 2160,2705 2160,2860 cw(c2201.11,2860) 2201.11,2901.11 2298.05,2901.11 ccw(c2298.05,2935) 2308.64,2902.8 ccw(c2307.39,2906.49) 2309.76,2903.4 cw(c2314,2898) 2312.99,2904.79 ccw(c2312.37,2908.63) 2314.17,2905.18 ccw(c2298.05,2935) 2331.95,2935 cw(c2344.45,2935) 2344.45,2947.5
RS485_P: P1.2 P2.2 R13.1 R14.2 U7.2 | length 2725.1
  Top Layer w3.89: U7.2 2305.55,2947.5 ; R14.2 cw(c2290,3095.45) 2318.05,3095.45 2318.05,3035 cw(c2308.05,3035) 2308.05,3025 R13.1 cw(c2293.5,3000.45) 2318.05,3000.45 2318.05,2960 cw(c2305.55,2960) 2305.55,2947.5 ; P1.2 ccw(c4050,2645) 4050,2680 3018.89,2680 ccw(c3018.89,2660) 2998.89,2660 cw(c2960,2660) 2960,2621.11 2658.89,2621.11 cw(c2658.89,2650) 2630,2650 2630,2666.16 ccw(c2615,2666.16) 2615,2681.16 2297.42,2681.16 ccw(c2297.42,2648.74) P2.2 ccw(c2237.63,2648.74) 2237.63,2676.11 2175,2676.11 cw(c2175,2705) 2146.11,2705 2146.11,2860 cw(c2201.11,2860) 2201.11,2915 2298.05,2915 ccw(c2298.05,2935) 2318.05,2935 ccw(c2305.55,2935) 2305.55,2947.5
RS485X_N: R12.1 U6.7 | length 125.7
  Top Layer w3.89: U6.7 ccw(c2350,3263.68) 2331.95,3263.68 2331.95,3205 ccw(c2350.45,3205) 2350.45,3186.5 R12.1
RS485X_P: R14.1 U6.6 | length 125.7
  Top Layer w3.89: R14.1 2299.55,3186.5 ccw(c2299.55,3205) 2318.05,3205 2318.05,3263.68 ccw(c2300,3263.68) U6.6
RUN: S1.2 TP5-RUN.1 U2.26 | length 987.4
  Top Layer w10: U2.26 2964.61,3347.56 3035,3277.17 3035,3130 3080,3085 3135,3085 TP5-RUN.1
  Bottom Layer w10: TP5-RUN.1@3310,2920 3310,2933.53 3333.71,2957.24 3333.71,2958.71 3355,2980 3404.09,2980 3412.68,2971.42 S1.2@3412.68,3148.58
SWCLK: J2.1 U2.24 | length 551.3
  Top Layer w8: 2933.11,3336.85 U2.24
  Top Layer w10: 2933.11,3336.85 3000,3269.96 3000,3030 J2.1
SWD: J2.2 U2.25 | length 444.7
  Top Layer w8: 2948.86,3342.2 U2.25
  Top Layer w10: 2948.86,3342.2 3016.84,3274.22 3016.84,3113.16 J2.2
UART1_RX: R11.1 TP10-RX1.1 U2.8 U6.1 | length 737.1
  Top Layer w7.87: v1(2380.39,3537.19) 2380.39,3533.62 2400,3514.02 U6.1 2441.73,3540 2695.5,3540 2710.54,3555.03 U2.8
  Bottom Layer w7.87: TP10-RX1.1 2272.59,3645 v1(2380.39,3537.19)
UART1_TX: TP8-TX1.1 U2.7 U6.4 | length 699.6
  Top Layer w7.87: TP8-TX1.1 2246.73,3495 U6.4 2250,3514.02 2305.98,3570 2561.73,3570 2576.73,3555 2692.41,3555 2708.19,3570.78 U2.7
VREG_AVDD: C4.1 R1.2 U2.46 | length 274.3
  Top Layer w8: U2.46 3027.6,3731.77
  Top Layer w10: 3027.6,3731.77 3126.69,3830.86 3127.68,3830.86 3142.36,3845.55 R1.2 C4.1@3142.36,3917.04
VREG_LX: L1.2 U2.48 | length 292
  Top Layer w8: U2.48 2996.1,3756.1
  Top Layer w10: 2996.1,3756.1 2996.1,3948.78 L1.2@3020.2,3972.88
XIN: C7.1 U2.21 Y1.1 | length 436.9
  Top Layer w10: C7.1 2704.25,3093.41 2704.25,3109.25 2735.31,3140.31 Y1.1 2767.91,3226.14 2885.87,3344.09 U2.21
XOUT: R3.2 U2.22 | length 225.1
  Top Layer w10: U2.22 2901.61,3202.28 R3.2
pads on no net: J1.4 U2.2 U2.3 U2.4 U2.5 U2.10 U2.12 U2.13 U2.14 U2.15 U2.16 U2.17 U2.18 U2.19 U2.29 U2.31 U2.32 U2.33 U2.34 U2.35 U2.36 U2.37 U2.41 U5.4

## Polygon pours and split planes (outlines as drawn)
5V on Top Layer "T.5V" (solid, pour order 10): 4235.71,3065.71 4300.71,3130.71 ccw(c4230,3201.42) 4330,3201.42 4330,4215 ccw(c4269.65,4215) 4312.32,4257.68 4235.71,4334.29 4084.14,4485.86 ccw(c4050.01,4451.73) 4050,4500 3070.15,4500 3075,4500 ccw(c3075,4470) 3045,4470 3045,4325 ccw(c3080,4325) 3080,4290 3745,4290 ccw(c3745,4321.34) 3776.34,4321.34 3776.34,4431.34 cw(c3790,4431.34) 3790,4445 3870,4445 cw(c3870,4435) 3880,4435 3880,4430 ccw(c3885,4430) 3885,4425 3980,4425 cw(c3980,4410) 3995,4410 3995,4307.04 ccw(c4031.98,4307.12) 4032.06,4270.14 ccw(c4035,4300.06) 4035,4270 4100,4270 cw(c4100,4245) 4125,4245 4125,3410 cw(c4060,3410) 4060,3345 3870,3345 ccw(c3870,3275) 3800,3275 3800,2906.74 ccw(c3871.74,2906.73) 3871.74,2835 3975,2835 ccw(c3975,2907.43) 4026.21,2856.21
3V3 on Top Layer "T.3V3-2" (solid, pour order 16): 3292.03,4200.72 cw(c3302.03,4200.72) 3302.03,4210.72 3302.69,4210.4 3412.64,4210.4 3412.64,4140.36 3302.69,4140.36 cw(c3302.69,4150.36) 3292.69,4150.36 3292.03,4150.72
1V1 on Top Layer "T.1V1-1" (solid, pour order 3): 2831.22,3642.04 3004.45,3642.04 3004.45,3468.81 2831.22,3468.81
3V3 on Top Layer "T.3V3-1" (solid, pour order 5): 3105.24,3365.03 2722.36,3365.03 2722.36,3740.03 3105.24,3740.03
3V3 on Top Layer "T.3V3-3" (solid, remove dead copper, pour order 14): 2500,4125 cw(c2500,4105) 2520,4105 2520,4090 ccw(c2550,4090) 2550,4060 2648.58,4060 cw(c2648.58,3960) 2719.29,4030.71 2745.25,4004.75 cw(c2685.5,3945) 2770,3945 2770,3875 ccw(c2780,3875) 2780,3865 2810,3865 cw(c2810,3853.78) 2821.22,3853.78 2821.22,3835 ccw(c2866.22,3835) 2866.22,3790 3100,3790 ccw(c3100,3795) 3105,3795 3105,3855 cw(c3115,3855) 3115,3865 3180,3865 ccw(c3180,3870) 3185,3870 3185,4100 cw(c3210,4100) 3210,4125 3225,4125 ccw(c3225,4180) 3280,4180 3280,4255 cw(c3335,4255) 3335,4310 3767.25,4310 ccw(c3767.25,4323.81) 3781.06,4323.81 3781.06,4430.47 cw(c3790.43,4430.63) 3790.26,4440 3863.68,4440 cw(c3863.68,4429.01) 3874.67,4429.01 3874.67,4304.8 ccw(c3889.79,4304.8) 3889.79,4289.69 4078.18,4289.69 cw(c4078.18,4248.57) 4119.3,4248.57 4119.3,4125 cw(c4074.3,4125) 4074.3,4080 3980,4080 ccw(c3980,3990) 3890,3990 3890,3667.84 cw(c3790,3667.84) 3860.71,3597.13 3584.29,3320.71 ccw(c3655,3250) 3555,3250 3555,2825 cw(c3490,2825) 3490,2760 2630,2760 cw(c2630,2850) 2540,2850 2540,3060 ccw(c2480,3060) 2480,3120 2425,3120 cw(c2425,3145) 2400,3145 2400,3215 ccw(c2385,3215) 2385,3230 2370,3230 cw(c2370,3240) 2360,3240 2360,4075 cw(c2410,4075) 2410,4125
3V3 on Top Layer "T.3V3-2" (solid, pour order 18): 3920,4167.55 ccw(c3912.17,4167.55) 3912.17,4175.39 3740.39,4175.39 ccw(c3740.39,4170) 3735,4170 3735,4084.21 ccw(c3742.56,4084.21) 3742.56,4076.65 3912.17,4076.65 ccw(c3912.17,4084.48) 3920,4084.48 3920,4090
GND on Top Layer "T.GND-2" (solid, pour order 8): 3592.97,4149.28 cw(c3582.97,4149.28) 3582.97,4139.28 3582.31,4139.6 3472.36,4139.6 3472.36,4209.64 3582.31,4209.64 cw(c3582.31,4199.64) 3592.31,4199.64 3592.97,4199.28
3V3 on Top Layer "T.3V3-2" (solid, pour order 15): 3860,4445 cw(c3860,4432.1) 3872.9,4432.1 3872.9,4298.17 ccw(c3875.88,4298.17) 3875.88,4295.19 ccw(c3879.32,4298.32) 3879.1,4293.68 3839.48,4293.68 ccw(c3839.48,4292.36) 3838.16,4292.36 3778.82,4292.36 ccw(c3778.82,4295.21) 3781.67,4295.21 3781.67,4436.67 cw(c3790,4436.67) 3790,4445 3828.16,4445
5V on Top Layer "T.5V-2" (solid, pour order 11): 3258.68,4420 cw(c3268.68,4420) 3268.68,4430 3411.32,4430 3411.32,4359.97 3268.68,4359.97 cw(c3268.68,4369.97) 3258.68,4369.97
GND on Top Layer "T.GND-2" (solid, pour order 9): 3975,4416.84 cw(c3975,4401.84) 3990,4401.84 3990,4310 cw(c3975,4310) 3975,4295 3892.7,4295 cw(c3892.77,4309.54) 3878.23,4309.61 3878.23,4400 cw(c3894.7,4400) 3894.7,4416.47 3895.07,4416.84
GND on Top Layer "T.GND-2" (solid, pour order 7): 3625,4370 cw(c3615,4370) 3615,4360 3472.36,4360 3472.36,4430.03 3615,4430.03 cw(c3615,4420.03) 3625,4420.03
GND on Top Layer "T.GND-1" (solid, pour order 6): 2961.46,2945 cw(c2937.8,2942.79) 2940,2919.13 2935,2919.13 2670,2919.13 cw(c2670,2944.13) 2645,2944.13 2645,2955 2645,3220 cw(c2665.92,3220) 2665.92,3240.92 2666.6,3241.97 2935,3241.97 cw(c2935,3216.08) 2960.88,3216.08 2961.46,3210.71
GND on Bottom Layer "B.GND" (solid, pour order 20): 1870.06,2211.15 cw(c1994.2,2219.79) 1869.76,2219.79 1870.06,2221.49 1870.06,4550.7 1869.37,4553.22 cw(c1993.81,4553.22) 1905.82,4641.21 cw(c1993.81,4553.22) 1981.56,4677.05 1985,4678.45 4355.44,4678.45 cw(c4355.44,4554.01) 4443.43,4642 cw(c4355.44,4554.01) 4479.87,4554.82 4479.94,4554.01 4479.94,2219.5 cw(c4355.5,2219.5) 4443.49,2131.51 cw(c4355.5,2219.5) 4355.5,2095.06 1990,2095.06 1987.93,2095.52 cw(c1994.2,2219.79) 1906.21,2131.81 cw(c1994.2,2219.79)
EARTH on Bottom Layer "B.EARTH" (solid, pour order 19): 3285,4490 ccw(c3270,4490) 3270,4505 3230,4505 ccw(c3230,4490) 3215,4490 3215,4455 cw(c3205,4455) 3205,4445 2895,4445 2895,4228.36 cw(c2870.01,4228.36) 2870.01,4203.37 2620,4205 cw(c2620,4230) 2595,4230 2595,4445 2145,4445 ccw(c2145,4435) 2135,4435 2135,4202.88 cw(c2132.66,4202.88) 2132.66,4200.54 2134.73,2354.98 4459.39,2359.96 ccw(c4464.95,2359.96) 4464.95,2354.39 4464.96,2354.39 4464.96,2210.04 cw(c4364.97,2210.03) 4364.96,2110.04 ccw(c4364.96,2105) 4359.93,2105 1980,2105 cw(c1980,2205) 1880,2205 1880,4565 cw(c1980,4565) 1980,4665 4365,4665 cw(c4365,4565) 4465,4565 4465,4449.96 3300,4445 cw(c3300,4460) 3285,4460

## Keep-outs
Keep-Out Layer:
  lines w9.84: 1874.31,4553.22 cw(c1993.81,4553.22) 1909.31,4637.72 cw(c1993.81,4553.22) 1993.81,4672.72 ; 1874.7,2219.79 ccw(c1994.2,2219.79) 1909.7,2135.3 ccw(c1994.2,2219.79) 1994.2,2100.3 ; 1875,2210 1875,4560 ; 1985,4673.51 4355.44,4673.51 cw(c4355.44,4554.01) 4439.94,4638.51 cw(c4355.44,4554.01) 4474.94,4554.01 ; 1990,2100 4355.5,2100 ccw(c4355.5,2219.5) 4440,2135 ccw(c4355.5,2219.5) 4475,2219.5 4475,4554.01

## Silkscreen, mask and mechanical layers (free items; w line width, h text height)
Top Overlay:
  circle w10: c3277.36,4395.03 r5
  circle w10: c3275,4175 r5
  text "5V" at 3923,3963 h30
  text "GND" at 3913,3758 h30
  text "GND" at 3163,3118 h30
  text "SWD" at 3163,3023 h30
  text "SWC" at 3163,2913 h30
  text "RS485_A (-)" at 3678,2718 h30
  text "RS485_A (-)" at 2358,2708 h30
  text "RS485_B (+)" at 3678,2633 h30
  text "RS485_B (+)" at 2358,2623 h30
  text "GND" at 3898,2558 h30
  text "GND" at 2356.81,2551.99 h30
Bottom Overlay:
  drawing of 10 lines, arcs and shapes, not listed
  text "Task 2 | Light Node" at 3397,3573 h30

## Text inside footprints (layer, text, board x,y; h text height)
U5: Top Overlay "IN" at 3683,4065 h20; Top Overlay "OUT" at 2984,4282 h20; Top Overlay "GND" at 2774,2707 h20 r0.81; Top Overlay "5V" at 3869,3242 h20; Top Overlay "5V" at 3744,2942 h20; Top Overlay "GND" at 2544,2937 h20 r0.81